# EAGLE board activity_monitor_v1 (EAGLE 6.4)
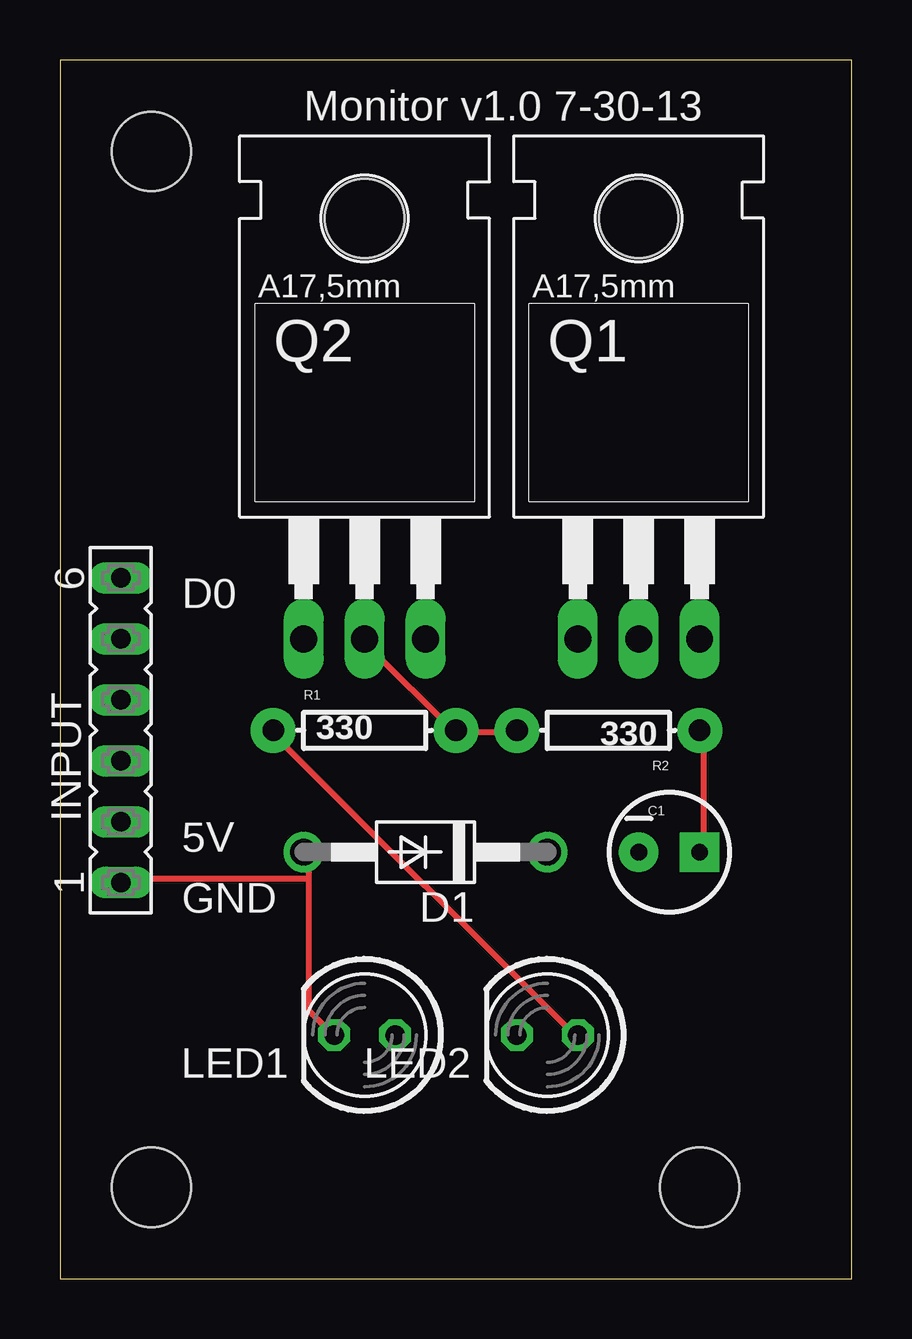
[diagram p0: board, top side]
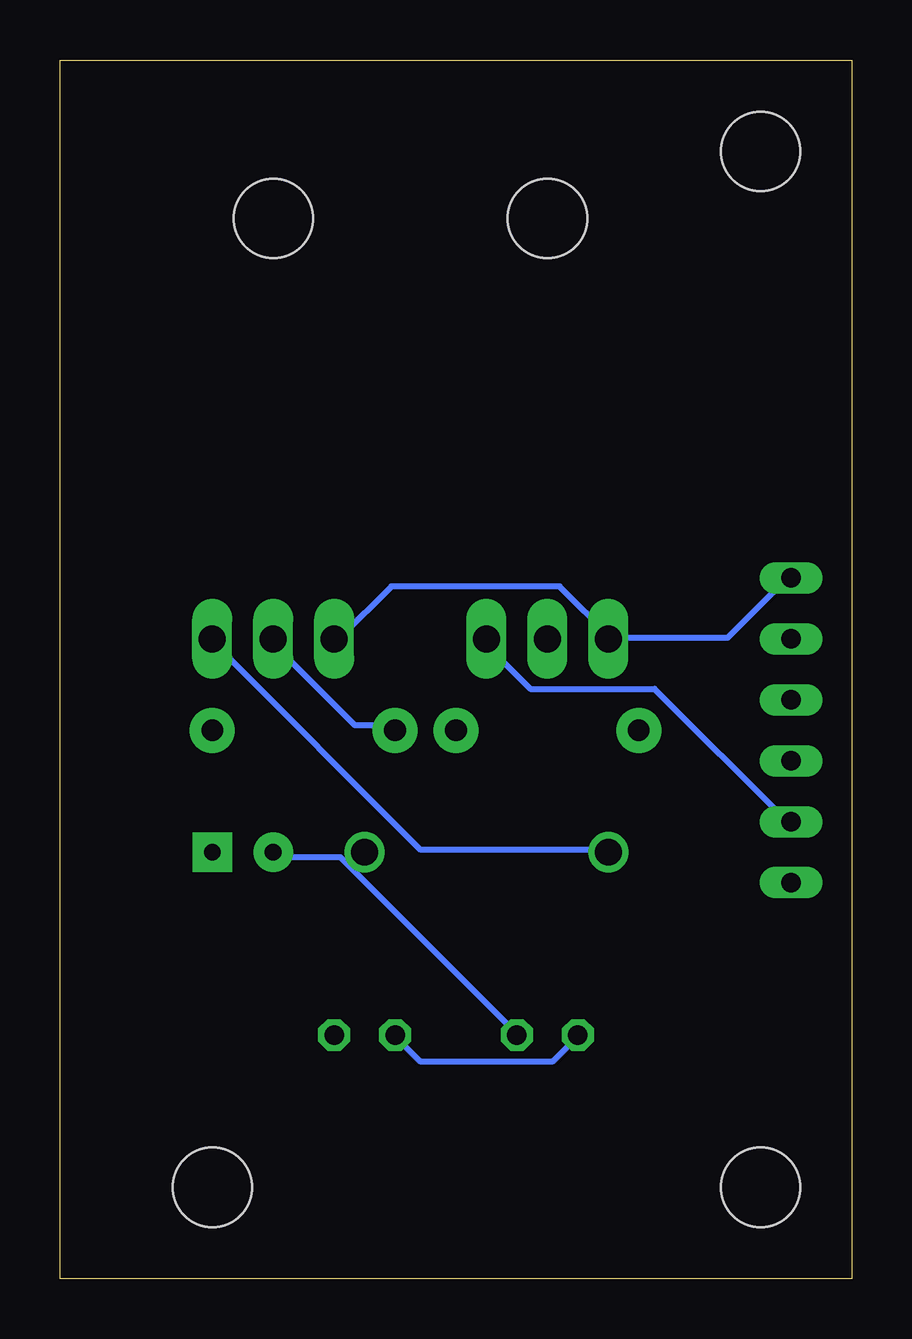
[diagram p1: board, bottom side, seen from below]

Size 33.02 x 50.8 mm. Coordinates in mm from the lower left corner, seen from the top.
Outline: 0,0 33.02,0 33.02,50.8 0,50.8 0,0
Copper layers (1*16): Top 0.035mm / dielectric 1.5mm / Bottom 0.035mm
Design rules "default": minimum track width 10mil, minimum drill 24mil, track to track 8mil, track to pad 8mil, pad to pad 8mil, via to via 8mil, smd to smd 8mil, copper to edge 40mil, drill to drill 8mil, minimum pad ring 10mil, minimum via ring 8mil, stop-mask expansion 4mil, vias tented up to drill 0mil, thermal gap 10mil

## Footprints (pad centres in the part's own frame; a part is rotated, then mirrored left to right if it is on the bottom)
CPOL-RADIAL-10UF-25V = drill 0.7 pad 1.651 square: 1 1.27,0 | drill 0.7 pad 1.651: 2 -1.27,0
DO41-10 = drill 1.118: A 5.08,0; C -5.08,0
FE06 = drill 0.813 long: 1 -6.35,0; 2 -3.81,0; 3 -1.27,0; 4 1.27,0; 5 3.81,0; 6 6.35,0
LED5MM = drill 0.813 octagon: A -1.27,0; K 1.27,0
TO220 = drill 1.118 long: 1 -2.54,-6.35; 2 0,-6.35; 3 2.54,-6.35 | hole 3.302: 0,11.176
AXIAL-0.3 = drill 0.9 pad 1.88: P$1 -3.81,0; P$2 3.81,0
STAND-OFF = hole 3.302: 0,0

## Placement (x,y rotation side)
C1  10uF  [CPOL-RADIAL-10UF-25V]  25.4,17.78 0 top
D1  [DO41-10]  15.24,17.78 180 top
INPUT  [FE06]  2.54,22.86 90 top
LED1  [LED5MM]  12.7,10.16 180 top
LED2  [LED5MM]  20.32,10.16 180 top
Q1  NFET  [TO220]  24.13,33.02 0 top
Q2  PFET  [TO220]  12.7,33.02 0 top
R1  330  [AXIAL-0.3]  12.7,22.86 0 top
R2  330  [AXIAL-0.3]  22.86,22.86 180 top
U$1  [STAND-OFF]  3.81,46.99 0 top
U$2  [STAND-OFF]  3.81,3.81 0 top
U$3  [STAND-OFF]  26.67,3.81 0 top

## Library data of the parts
C1 = SparkFun-Capacitors
D1 = diode
INPUT = con-lsta; OC_FARNELL: unknown; OC_NEWARK: unknown
LED1 LED2 = led
Q1 Q2 = transistor-fet
R1 R2 = SparkFun-Passives
U$1-U$3 = SparkFun-Electromechanical

## Nets
44: INPUT.6 Q1.1 Q2.1
GND: D1.A INPUT.1 LED1.K LED2.K Q1.3
N$1: LED2.A R1.P$1
N$2: C1.1 R2.P$1
N$4: C1.2 D1.C LED1.A
N$7: Q1.2 Q2.2 R1.P$2 R2.P$2
VCC: INPUT.2 Q2.3

## Tracks (layer width: path | path; a pad name or v marks a point on that pad's centre or on a via)
44
  Bottom 0.254: 10.06,26.72 5.18,26.72 2.74,29.16 INPUT.6 | 10.06,26.72 12.19,28.85 19.2,28.85 21.34,26.72 Q1.1 | 10.06,26.72 Q2.1
GND
  Top 0.254: 10.36,16.66 10.36,17.58 D1.A | 10.36,16.66 10.36,11.18 11.28,10.26 LED1.K | 10.36,16.66 2.74,16.66 INPUT.1
  Bottom 0.254: LED2.K 18.9,9.96 17.98,9.04 12.5,9.04 11.58,9.96 LED1.K | Q1.3 26.52,26.42 17.98,17.88 10.36,17.88 D1.A
N$1
  Top 0.254: LED2.A 21.34,10.26 9.14,22.45 9.14,22.76 R1.P$1
N$2
  Top 0.254: C1.1 26.82,17.88 26.82,22.76 R2.P$1
N$4
  Bottom 0.254: 21.03,17.27 21.34,17.58 24.08,17.58 C1.2 | 21.03,17.27 14.02,10.26 LED1.A | 21.03,17.27 20.73,17.27 20.42,17.58 D1.C
N$7
  Top 0.254: Q2.2 12.8,26.42 16.46,22.76 R1.P$2 16.76,22.76 18.9,22.76 R2.P$2
  Bottom 0.254: Q1.2 24.08,26.42 20.73,23.06 19.2,23.06 R2.P$2
VCC
  Bottom 0.254: INPUT.2 2.74,19.1 8.23,24.59 13.41,24.59 15.24,26.42 Q2.3

## Text on the board
tPlace: Monitor v1.0 7-30-13 | D0 | 5V | GND